# EAGLE board NanoLiteUSB_Panelize (EAGLE 6.3)
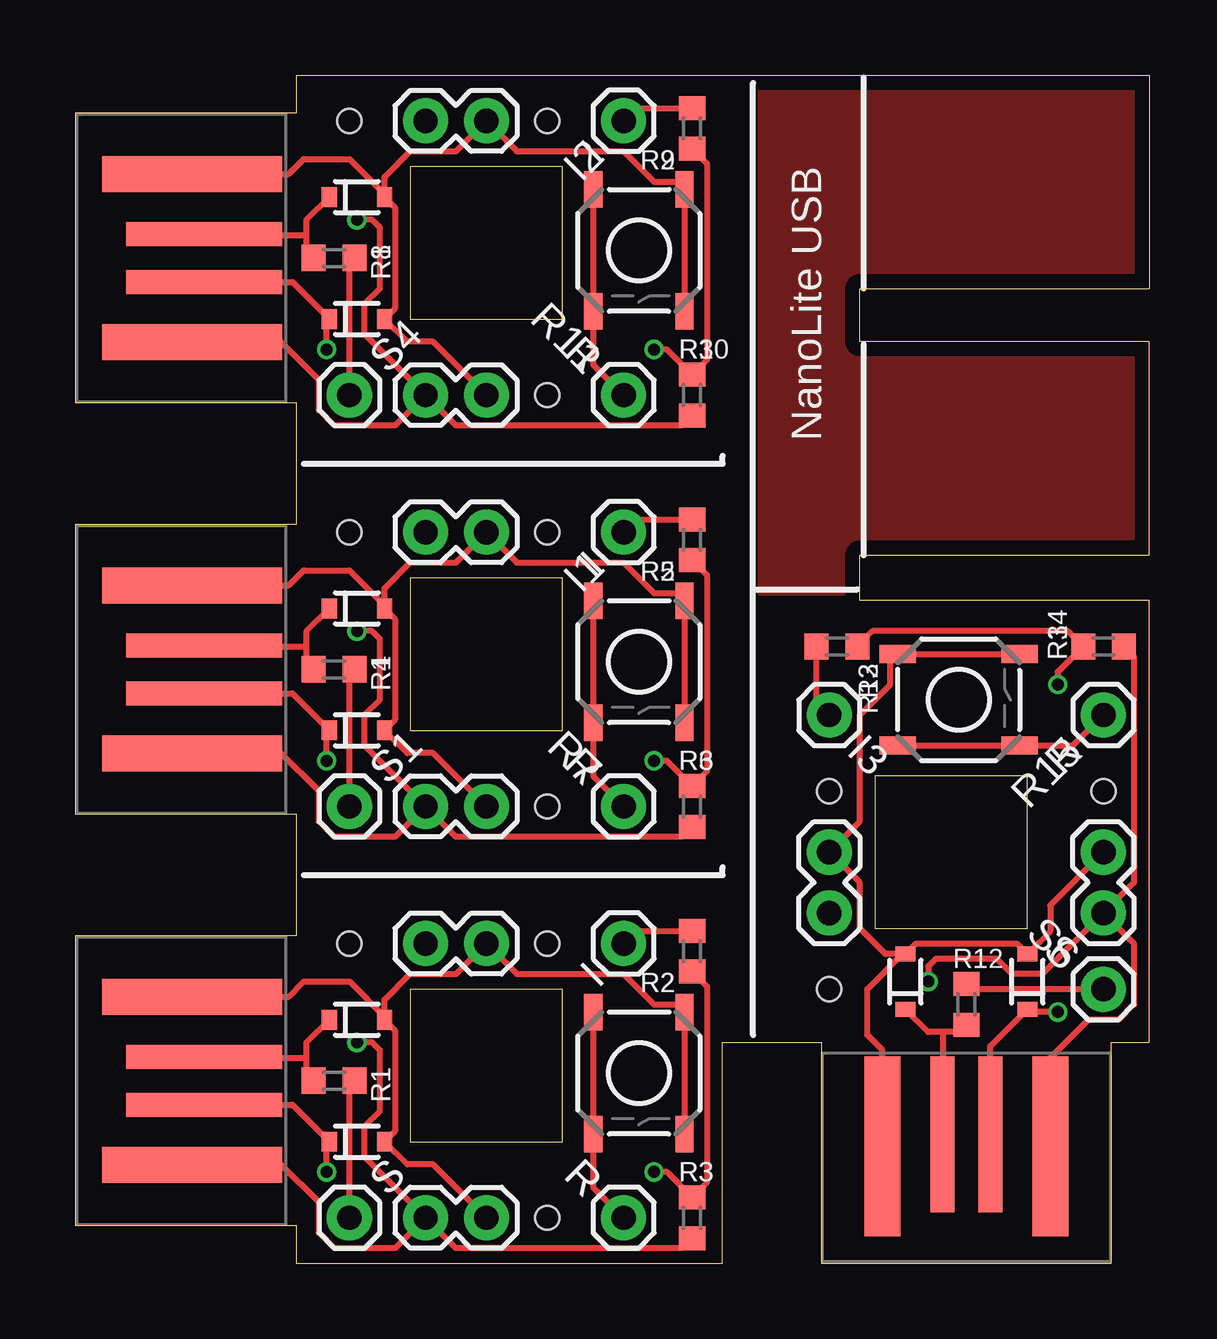
[diagram p0: board, top side]
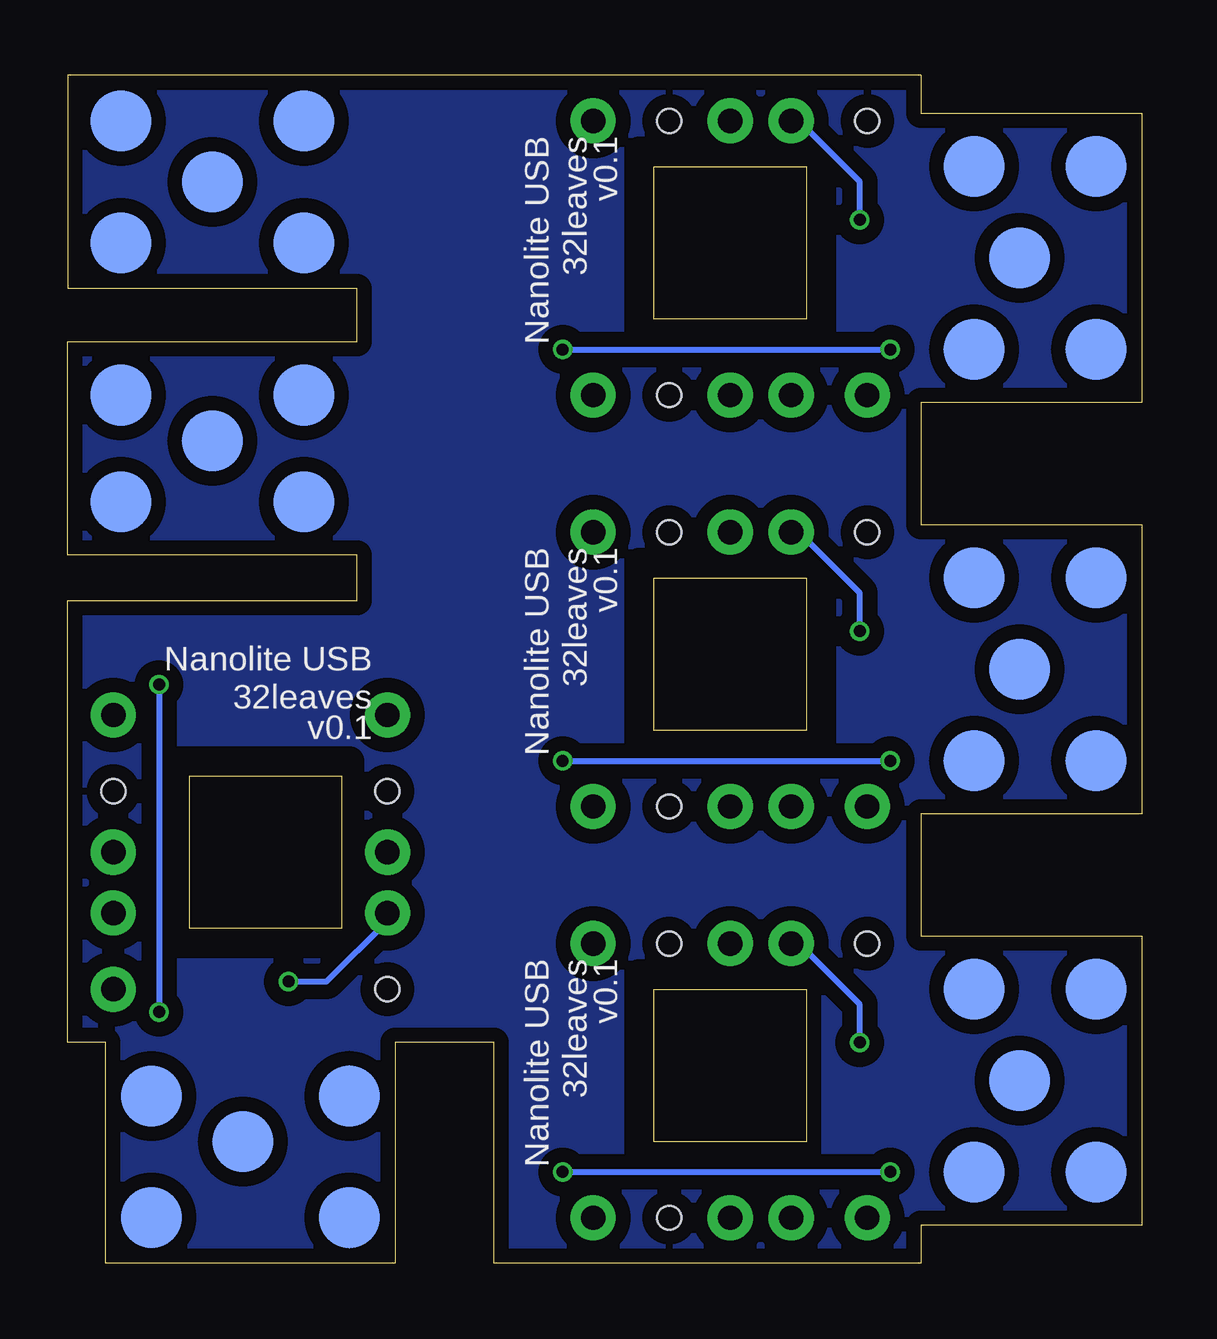
[diagram p1: board, bottom side, seen from below]

Size 44.77 x 49.53 mm. Coordinates in mm from the lower left corner, seen from the top.
Outline: 0,1.59 9.21,1.59 9.21,0 26.99,0 26.99,9.21 31.11,9.21 31.11,0 43.18,0 43.18,9.21 44.77,9.21 44.77,27.62 32.7,27.62 32.7,29.53 44.77,29.53 44.77,38.42 32.7,38.42 32.7,40.64 44.77,40.64 44.77,49.53 9.21,49.53 9.21,47.94 0,47.94 0,35.88 9.21,35.88 9.21,30.8 0,30.8 0,18.73 9.21,18.73 9.21,13.65 0,13.65 0,1.59
Outline: 13.97,11.43 13.97,5.08 20.32,5.08 20.32,11.43 13.97,11.43
Outline: 13.97,28.57 13.97,22.23 20.32,22.23 20.32,28.57 13.97,28.57
Outline: 13.97,45.72 13.97,39.37 20.32,39.37 20.32,45.72 13.97,45.72
Outline: 33.34,13.97 39.69,13.97 39.69,20.32 33.34,20.32 33.34,13.97
Copper layers (1*16): Top 0.035mm / dielectric 1.5mm / Bottom 0.035mm
Design rules "Fusion_eagle_rule_v1.1": minimum track width 6mil, minimum drill 12mil, track to track 6mil, track to pad 6mil, pad to pad 6mil, via to via 6mil, smd to smd 0mil, copper to edge 10mil, drill to drill 10mil, minimum pad ring 10mil, minimum via ring 6mil, stop-mask expansion 2mil, vias tented up to drill 100mil, thermal gap 10mil
Net classes: 1 vcc: width 0.254 mm
Holes 1 mm at 11.43,13.34 19.68,13.34 19.68,1.91 11.43,30.48 19.68,30.48 19.68,19.05 11.43,47.62 19.68,47.62 19.68,36.2 31.43,11.43 31.43,19.68 42.86,19.68
bRestrict: area 13.3,21.6 to 21,29.2; area 13.3,38.7 to 21,46.4; area 14,4.4 to 21,12.1; area 33,13.3 to 40.6,21

## Footprints (pad centres in the part's own frame; a part is rotated, then mirrored left to right if it is on the bottom)
SOLDERMOUNT = smd 2.54 x 2.54: P$1 0,0
1X01 = drill 1.016 pad 1.88: 1 0,0
USB-A-PCB = smd 7.5 x 1.5: 5V -0.2,-3.5; GND -0.2,3.5 | smd 6.5 x 1: USB_M 0.3,-1; USB_P 0.3,1
1X02 = drill 1.016 pad 1.88: 1 0,0; 2 2.54,0
R0603 = smd 1 x 1.1: 1 -0.85,0; 2 0.85,0
TACTILE_SWITCH_SMD = smd 1.524 x 0.762: 1 -2.54,1.905; 2 2.54,1.905; 3 -2.54,-1.905; 4 2.54,-1.905
SOD-323 = smd 0.63 x 0.83: 1 -1.15,0; 2 1.15,0

## Placement (x,y rotation side)
E$1  [SOLDERMOUNT]  34.92,47.62 0 bottom
E$2  [SOLDERMOUNT]  34.92,42.55 0 bottom
E$3  [SOLDERMOUNT]  42.55,42.55 0 bottom
E$4  [SOLDERMOUNT]  42.55,47.62 0 bottom
E$5  [SOLDERMOUNT]  38.73,45.09 0 bottom
E$6  [SOLDERMOUNT]  34.92,36.2 0 bottom
E$7  [SOLDERMOUNT]  34.92,31.75 0 bottom
E$8  [SOLDERMOUNT]  42.55,31.75 0 bottom
E$9  [SOLDERMOUNT]  42.55,36.2 0 bottom
E$10  [SOLDERMOUNT]  38.73,34.29 0 bottom
E$11  [SOLDERMOUNT]  33.02,6.99 0 bottom
E$12  [SOLDERMOUNT]  33.02,1.91 0 bottom
E$13  [SOLDERMOUNT]  41.27,1.91 0 bottom
E$14  [SOLDERMOUNT]  41.27,6.99 0 bottom
E$15  [SOLDERMOUNT]  37.47,5.08 0 bottom
E$16  [SOLDERMOUNT]  1.91,3.81 0 bottom
E$17  [SOLDERMOUNT]  1.91,11.43 0 bottom
E$18  [SOLDERMOUNT]  6.99,11.43 0 bottom
E$19  [SOLDERMOUNT]  6.99,3.81 0 bottom
E$20  [SOLDERMOUNT]  5.08,7.62 0 bottom
E$21  [SOLDERMOUNT]  5.08,24.77 0 bottom
E$22  [SOLDERMOUNT]  1.91,28.57 0 bottom
E$23  [SOLDERMOUNT]  6.99,28.57 0 bottom
E$24  [SOLDERMOUNT]  1.91,20.95 0 bottom
E$25  [SOLDERMOUNT]  6.99,20.95 0 bottom
E$26  [SOLDERMOUNT]  5.08,41.91 0 bottom
E$27  [SOLDERMOUNT]  1.91,38.1 0 bottom
E$28  [SOLDERMOUNT]  1.91,45.72 0 bottom
E$29  [SOLDERMOUNT]  6.99,45.72 0 bottom
E$30  [SOLDERMOUNT]  6.99,38.1 0 bottom
I  M01PTH  [1X01]  22.86,13.34 90 top
I1  M01PTH  [1X01]  22.86,30.48 90 top
I2  M01PTH  [1X01]  22.86,47.62 90 top
I3  M01PTH  [1X01]  31.43,22.86 180 top
JP1  USBPCB  [USB-A-PCB]  5.08,7.62 0 top
JP2  M02PTH  [1X02]  14.61,13.34 0 top
JP3  M02PTH  [1X02]  14.61,1.91 0 top
JP4  USBPCB  [USB-A-PCB]  5.08,24.77 0 top
JP5  M02PTH  [1X02]  14.61,30.48 0 top
JP6  M02PTH  [1X02]  14.61,19.05 0 top
JP7  USBPCB  [USB-A-PCB]  5.08,41.91 0 top
JP8  M02PTH  [1X02]  14.61,47.62 0 top
JP9  M02PTH  [1X02]  14.61,36.2 0 top
JP10  USBPCB  [USB-A-PCB]  37.15,5.08 90 top
JP11  M02PTH  [1X02]  31.43,14.61 90 top
JP12  M02PTH  [1X02]  42.86,14.61 90 top
R  M01PTH  [1X01]  22.86,1.91 0 top
R1  68  [R0603]  10.79,7.62 0 top
R2  68  [R0603]  25.72,13.02 90 top
R3  1.5k  [R0603]  25.72,1.91 270 top
R4  68  [R0603]  10.79,24.77 0 top
R5  68  [R0603]  25.72,30.16 90 top
R6  1.5k  [R0603]  25.72,19.05 270 top
R7  M01PTH  [1X01]  22.86,19.05 0 top
R8  68  [R0603]  10.79,41.91 0 top
R9  68  [R0603]  25.72,47.31 90 top
R10  1.5k  [R0603]  25.72,36.2 270 top
R11  M01PTH  [1X01]  22.86,36.2 0 top
R12  68  [R0603]  37.15,10.79 90 top
R13  68  [R0603]  31.75,25.72 180 top
R14  1.5k  [R0603]  42.86,25.72 0 top
R15  M01PTH  [1X01]  42.86,22.86 90 top
S  M01PTH  [1X01]  11.43,1.91 0 top
S1  M01PTH  [1X01]  11.43,19.05 0 top
S2  Reset  [TACTILE_SWITCH_SMD]  23.5,7.94 270 top
S3  Reset  [TACTILE_SWITCH_SMD]  23.5,25.08 270 top
S4  M01PTH  [1X01]  11.43,36.2 0 top
S5  Reset  [TACTILE_SWITCH_SMD]  23.5,42.23 270 top
S6  M01PTH  [1X01]  42.86,11.43 90 top
S7  Reset  [TACTILE_SWITCH_SMD]  36.83,23.5 0 top
U$1  3V6  [SOD-323]  11.75,5.08 0 top
U$2  3V6  [SOD-323]  11.75,10.16 0 top
U$3  3V6  [SOD-323]  11.75,22.23 0 top
U$4  3V6  [SOD-323]  11.75,27.3 0 top
U$5  3V6  [SOD-323]  11.75,39.37 0 top
U$6  3V6  [SOD-323]  11.75,44.45 0 top
U$7  3V6  [SOD-323]  39.69,11.75 90 top
U$8  3V6  [SOD-323]  34.61,11.75 90 top

## Library data of the parts
E$1-E$30 = soldermount
I I1-I3 JP1-JP12 R R7 R11 R15 S S1 S4 S6 = SparkFun-Connectors
R1-R6 R8-R10 R12-R14 = resistor
S2 S3 S5 S7 = SparkFun
U$1-U$8 = SparkFun-DiscreteSemi

## Nets
GND: JP1.GND JP2.2 JP3.2 S2.1 S2.2 U$1.2 U$2.2
GND1: JP4.GND JP5.2 JP6.2 S3.1 S3.2 U$3.2 U$4.2
GND2: JP7.GND JP8.2 JP9.2 S5.1 S5.2 U$5.2 U$6.2
GND3: JP10.GND JP11.2 JP12.2 S7.1 S7.2 U$7.2 U$8.2
N$1: R.1 S2.3 S2.4
N$2: JP4.USB_P R4.1 U$4.1
N$3: JP1.USB_P R1.1 U$2.1
N$4: JP1.USB_M R2.1 R3.1 U$1.1
N$5: R1.2 S.1
N$6: I.1 R2.2
N$7: JP4.USB_M R5.1 R6.1 U$3.1
N$8: R4.2 S1.1
N$9: I1.1 R5.2
N$10: R7.1 S3.3 S3.4
N$11: JP7.USB_P R8.1 U$6.1
N$12: JP7.USB_M R9.1 R10.1 U$5.1
N$13: R8.2 S4.1
N$14: I2.1 R9.2
N$15: R11.1 S5.3 S5.4
N$16: JP10.USB_P R12.1 U$8.1
N$17: JP10.USB_M R13.1 R14.1 U$7.1
N$18: R12.2 S6.1
N$19: I3.1 R13.2
N$20: R15.1 S7.3 S7.4
S$1: JP10.5V
VCC: JP1.5V JP2.1 JP3.1 R3.2
VCC1: JP4.5V JP5.1 JP6.1 R6.2
VCC2: JP7.5V JP8.1 JP9.1 R10.2
VCC3: JP11.1 JP12.1 R14.2

## Tracks (layer width: path | path; a pad name or v marks a point on that pad's centre or on a via)
GND
  Top 0.254: S2.2 S2.1 25.08,10.79 24.13,10.79 22.86,12.06 18.41,12.06 JP2.2 15.88,12.06 13.97,12.06 12.9,10.99 U$2.2 | JP1.GND 8.9,11.12 9.53,11.75 11.43,11.75 12.9,10.28 U$2.2 | JP3.2 14.92,4.13 13.85,4.13 U$1.2 13.34,5.52 13.34,9.72 U$2.2
GND1
  Top 0.254: S3.2 S3.1 25.08,27.94 24.13,27.94 22.86,29.21 18.41,29.21 JP5.2 15.88,29.21 13.97,29.21 12.9,28.14 U$4.2 | JP4.GND 8.9,28.27 9.53,28.89 11.43,28.89 12.9,27.43 U$4.2 | JP6.2 14.92,21.27 13.85,21.27 U$3.2 13.34,22.66 13.34,26.87 U$4.2
GND2
  Top 0.254: S5.2 S5.1 25.08,45.09 24.13,45.09 22.86,46.35 18.41,46.35 JP8.2 15.88,46.35 13.97,46.35 12.9,45.28 U$6.2 | JP7.GND 8.9,45.41 9.53,46.04 11.43,46.04 12.9,44.57 U$6.2 | JP9.2 14.92,38.42 13.85,38.42 U$5.2 13.34,39.81 13.34,44.01 U$6.2
GND3
  Top 0.254: S7.2 S7.1 33.97,25.08 33.97,24.13 32.7,22.86 32.7,18.41 JP11.2 32.7,15.88 32.7,13.97 33.77,12.9 U$8.2 | JP10.GND 33.65,8.9 33.02,9.53 33.02,11.43 34.49,12.9 U$8.2 | JP12.2 40.64,14.92 40.64,13.85 U$7.2 39.25,13.34 35.05,13.34 U$8.2
N$1
  Top 0.254: S2.3 S2.4 21.59,3.17 R.1
N$2
  Top 0.254: JP4.USB_P 8.11,25.77 8.15,25.72 9.64,25.72 | R4.1 9.64,25.07 9.64,25.72 | 9.64,25.72 9.64,26.35 U$4.1
N$3
  Top 0.254: JP1.USB_P 8.11,8.62 8.15,8.57 9.64,8.57 | R1.1 9.64,7.92 9.64,8.57 | 9.64,8.57 9.64,9.21 U$2.1
N$4  (via drill 0.5 pad 0.25)
  Top 0.254: JP1.USB_M 9.06,6.62 U$1.1 | R2.1 26.35,11.53 26.35,3.39 R3.1 24.66,3.81 v24.13,3.81 | v10.48,3.81 10.48,4.96 U$1.1 | U$1.1 10.48,5.08
  Bottom 0.254: v24.13,3.81 v10.48,3.81
N$5
  Top 0.254: S.1 11.43,7.41 R1.2
N$6
  Top 0.254: I.1 23.39,13.87 R2.2
N$7  (via drill 0.5 pad 0.25)
  Top 0.254: JP4.USB_M 9.06,23.77 U$3.1 | R5.1 26.35,28.68 26.35,20.54 R6.1 24.66,20.95 v24.13,20.95 | v10.48,20.95 10.48,22.11 U$3.1 | U$3.1 10.48,22.23
  Bottom 0.254: v24.13,20.95 v10.48,20.95
N$8
  Top 0.254: S1.1 11.43,24.55 R4.2
N$9
  Top 0.254: I1.1 23.39,31.01 R5.2
N$10
  Top 0.254: S3.3 S3.4 21.59,20.32 R7.1
N$11
  Top 0.254: JP7.USB_P 8.11,42.91 8.15,42.86 9.64,42.86 | R8.1 9.64,42.21 9.64,42.86 | 9.64,42.86 9.64,43.5 U$6.1
N$12  (via drill 0.5 pad 0.25)
  Top 0.254: JP7.USB_M 9.06,40.91 U$5.1 | R9.1 26.35,45.82 26.35,37.68 R10.1 24.66,38.1 v24.13,38.1 | v10.48,38.1 10.48,39.25 U$5.1 | U$5.1 10.48,39.37
  Bottom 0.254: v24.13,38.1 v10.48,38.1
N$13
  Top 0.254: S4.1 11.43,41.7 R8.2
N$14
  Top 0.254: I2.1 23.39,48.16 R9.2
N$15
  Top 0.254: S5.3 S5.4 21.59,37.47 R11.1
N$16
  Top 0.254: JP10.USB_P 36.15,8.11 36.2,8.15 36.2,9.64 | R12.1 36.85,9.64 36.2,9.64 | 36.2,9.64 35.56,9.64 U$8.1
N$17  (via drill 0.5 pad 0.25)
  Top 0.254: JP10.USB_M 38.15,9.06 U$7.1 | R13.1 33.23,26.35 41.38,26.35 R14.1 40.96,24.66 v40.96,24.13 | v40.96,10.48 39.81,10.48 U$7.1 | U$7.1 39.69,10.48
  Bottom 0.254: v40.96,24.13 v40.96,10.48
N$18
  Top 0.254: S6.1 37.36,11.43 R12.2
N$19
  Top 0.254: I3.1 30.9,23.39 R13.2
N$20
  Top 0.254: S7.3 S7.4 41.59,21.59 R15.1
S$1
  Top 0.254: JP10.5V
S$2
  pour Bottom (isolate 0.61): 9.53,49.53 45.09,49.53 45.09,40.64 32.38,40.64 32.38,38.73 45.09,38.73 45.09,29.21 33.02,29.21 33.02,27.3 44.45,27.3 44.45,8.89 43.18,8.89 43.18,0 31.11,0 31.11,9.53 27.3,9.53 27.3,0 8.89,0 8.89,1.27 0,1.27 0,13.97 8.89,13.97 8.89,18.41 0,18.41 0,30.48 8.89,30.48 8.89,35.56 0,35.56 0,48.26 8.89,48.26 8.89,49.53
S$3
  pour Top (isolate 0.61): 28.57,49.53 44.45,49.53 44.45,40.64 33.02,40.64 33.02,38.1 44.45,38.1 44.45,29.21 33.02,29.21 33.02,27.94 28.57,27.94
VCC  (via drill 0.5 pad 0.25)
  Top 0.254: R3.2 25.3,0.64 15.88,0.64 JP3.1 | 5.19,3.81 JP1.5V 8.57,4.13 10.16,2.54 10.16,1.27 10.79,0.64 13.34,0.64 JP3.1 | JP3.1 12.06,4.45 12.06,5.71 12.7,6.35 12.7,8.89 12.38,9.21 v11.75,9.21
  Bottom 0.254: v11.75,9.21 11.75,10.79 14.29,13.34 JP2.1
VCC1  (via drill 0.5 pad 0.25)
  Top 0.254: R6.2 25.3,17.78 15.88,17.78 JP6.1 | 5.19,20.95 JP4.5V 8.57,21.27 10.16,19.68 10.16,18.41 10.79,17.78 13.34,17.78 JP6.1 | JP6.1 12.06,21.59 12.06,22.86 12.7,23.5 12.7,26.04 12.38,26.35 v11.75,26.35
  Bottom 0.254: v11.75,26.35 11.75,27.94 14.29,30.48 JP5.1
VCC2  (via drill 0.5 pad 0.25)
  Top 0.254: R10.2 25.3,34.92 15.88,34.92 JP9.1 | 5.19,38.1 JP7.5V 8.57,38.42 10.16,36.83 10.16,35.56 10.79,34.92 13.34,34.92 JP9.1 | JP9.1 12.06,38.73 12.06,40.01 12.7,40.64 12.7,43.18 12.38,43.5 v11.75,43.5
  Bottom 0.254: v11.75,43.5 11.75,45.09 14.29,47.62 JP8.1
VCC3  (via drill 0.5 pad 0.25)
  Top 0.254: R14.2 44.13,25.3 44.13,15.88 JP12.1 | JP12.1 40.32,12.06 39.05,12.06 38.42,12.7 35.88,12.7 35.56,12.38 v35.56,11.75 | 40.64,8.57 42.23,10.16 43.5,10.16 44.13,10.79 44.13,13.34 JP12.1
  Bottom 0.254: v35.56,11.75 33.97,11.75 31.43,14.29 JP11.1

## Text on the board
bNames: v0.1 | 32leaves | Nanolite USB | v0.1 | 32leaves | Nanolite USB | Nanolite USB | 32leaves | v0.1 | v0.1 | 32leaves | Nanolite USB
_tNames: I | R2 | NanoLite USB | R1 | R | R3 | S | I | R2 | R1 | R2 | R3 | R | R | R3 | I | S | I | S | R2 | R1 | R1 | R | S | R3